# Altium PCB Experiment 8.PcbDoc
Units mm, origin at the board's own origin, x right, y up, seen from the top; angles counter-clockwise.
Board outline 152.4 x 101.6 mm, 2 copper layers (Top Layer, Bottom Layer); 76 components, 93 nets, 240 pads, 20 vias.
Unrouted connection lines stored in the file: 14.
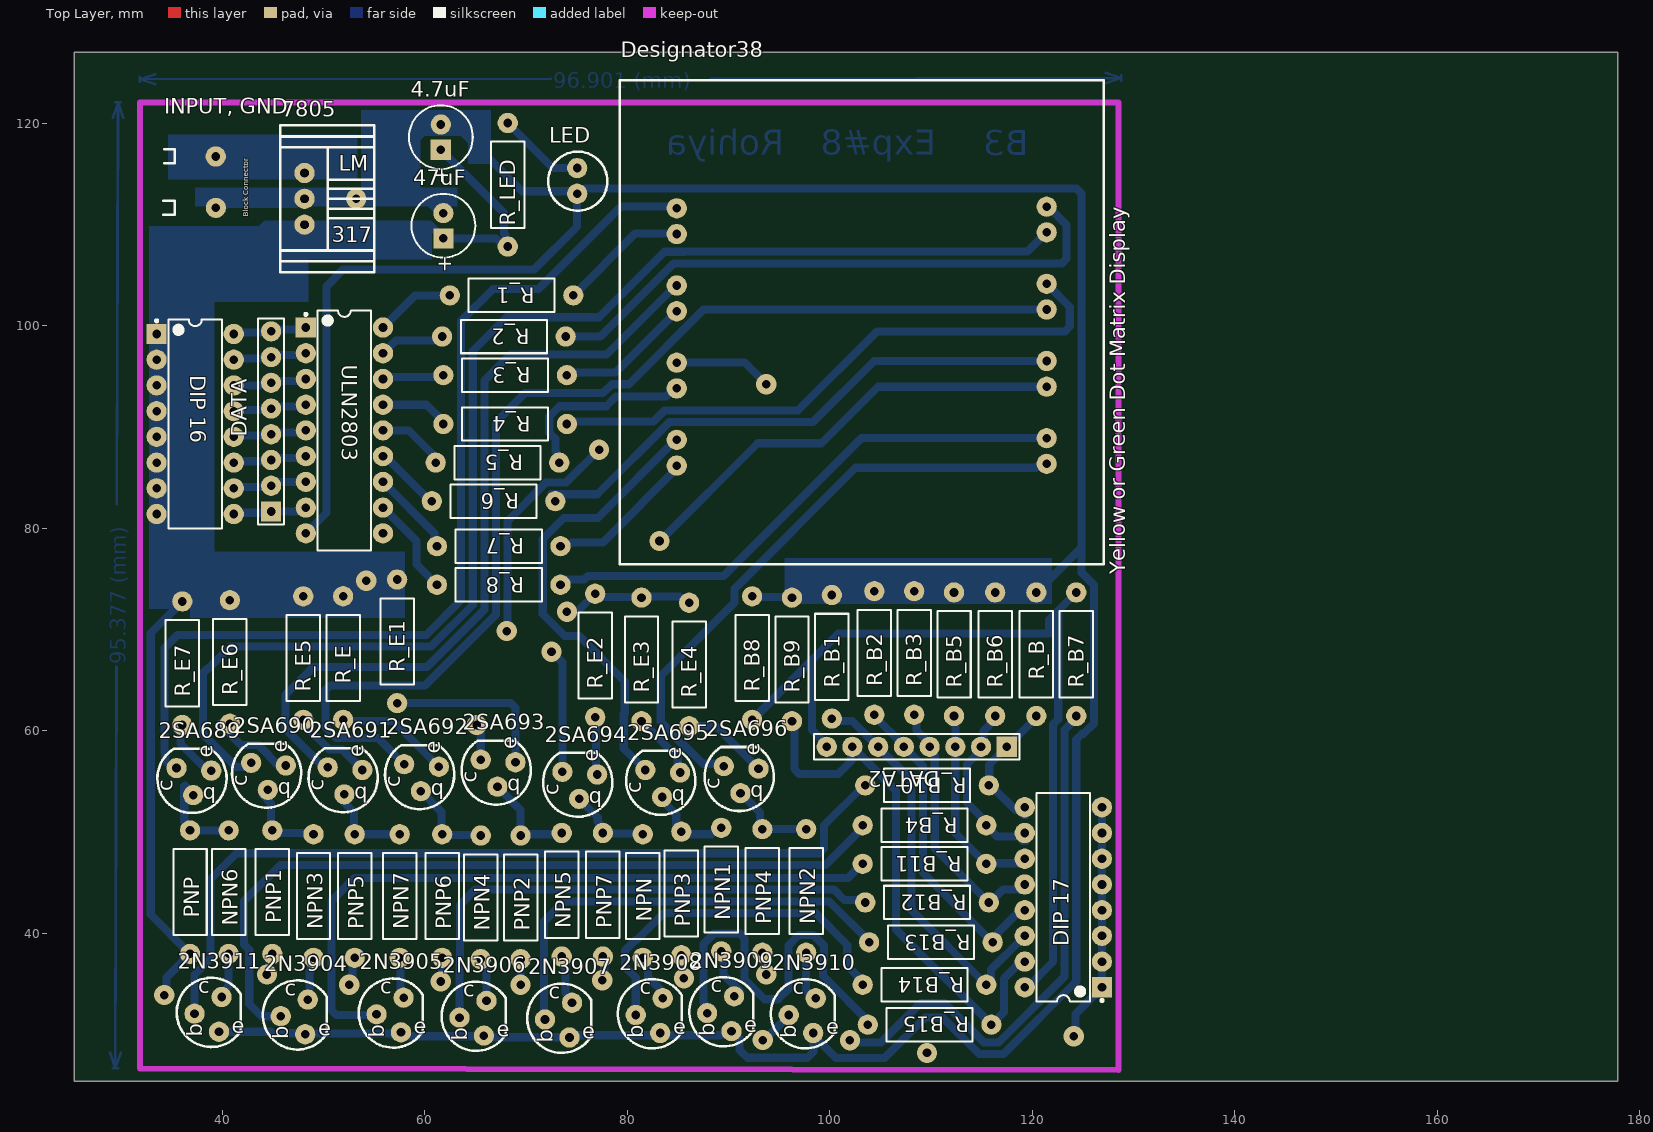
[diagram p0: Top Layer view]
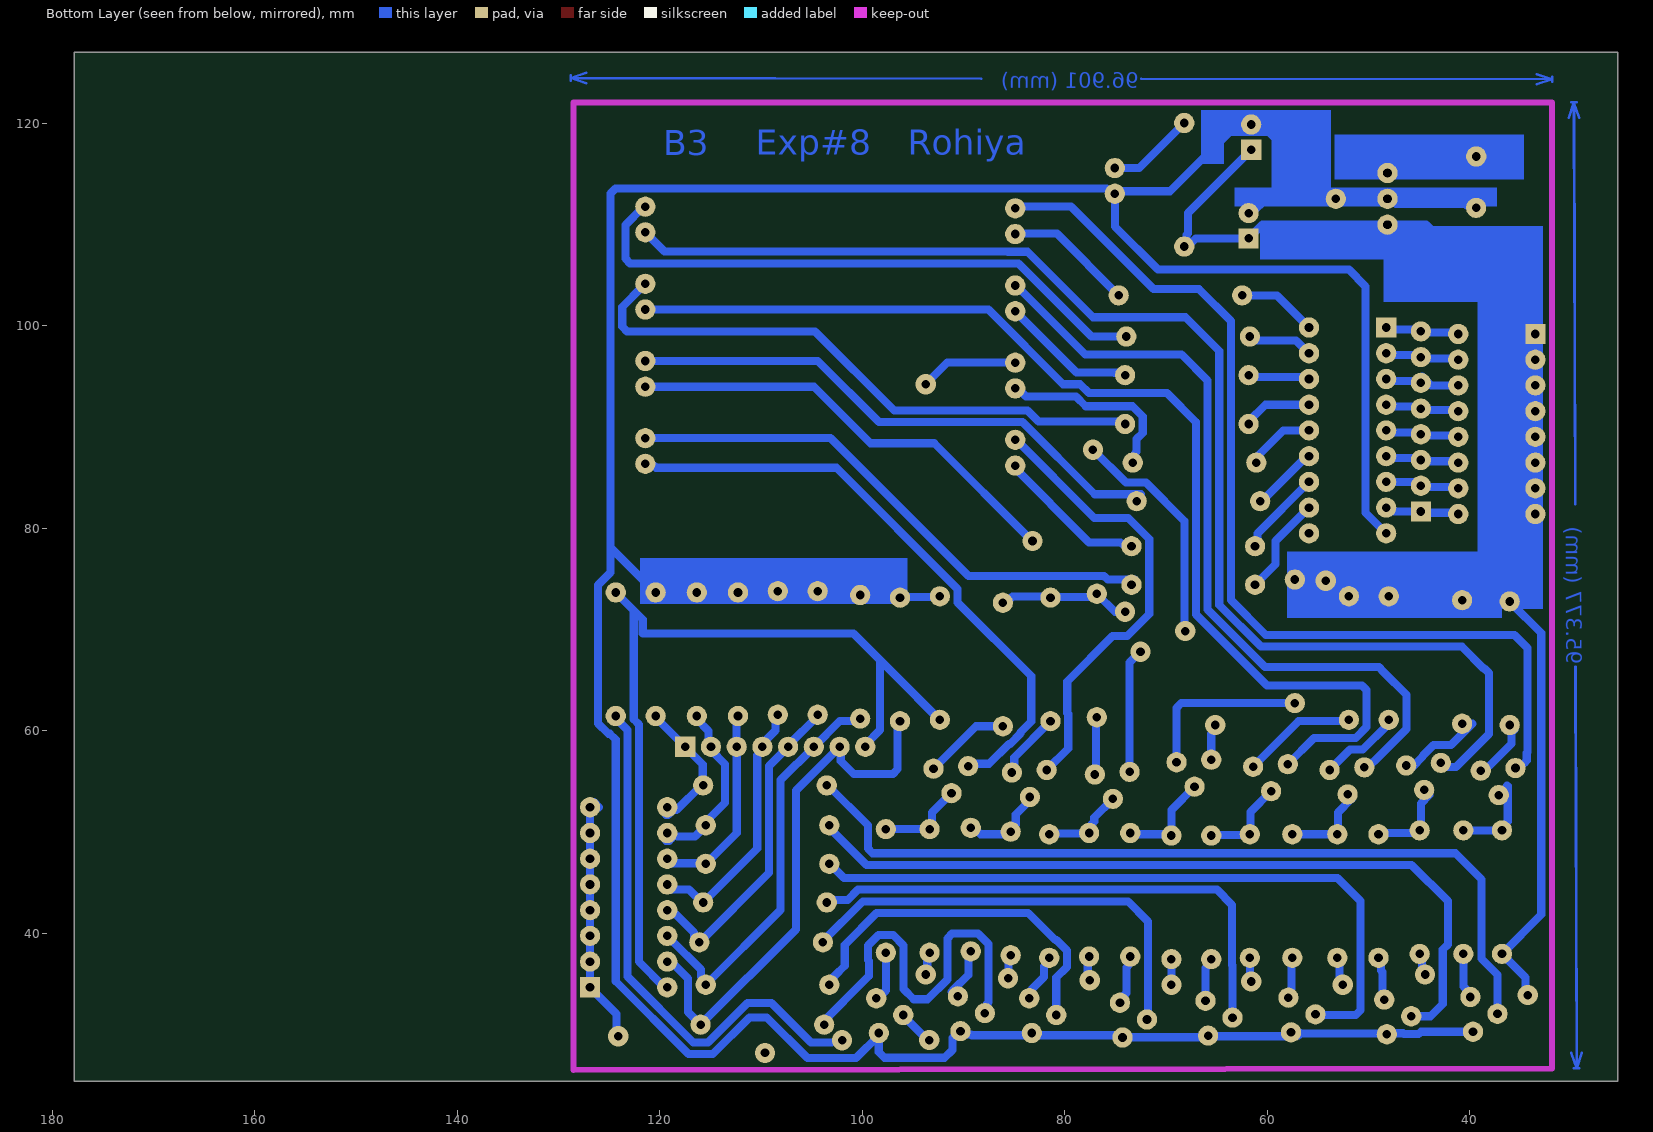
[diagram p1: Bottom Layer view, seen from below]

## Layer stack, top to bottom
Top Solder: solder mask 0.0102, Solder Resist, Dk 3.5
Top Layer: signal copper 0.0356
Dielectric 1: dielectric 0.32, FR-4, Dk 4.8
Bottom Layer: signal copper 0.0356
Bottom Solder: solder mask 0.0102, Solder Resist, Dk 3.5

## Board outline
25.4,25.4 177.8,25.4 177.8,127 25.4,127

## Design rules (kind name [scope] priority, off if disabled: settings)
Clearance [All] p1: gap=0.35 ignorepadtopadclearanceinfootprint=FALSE
PolygonConnect [All] p1: connectstyle=Relief reliefconductorwidth=0.254 reliefentries=4 polygonreliefangle="90 Angle" airgapwidth=0.254
RoutingVias [All] p1: holewidth=0.711 width=1.27 viastyle="Through Hole" minholewidth=0.711 minwidth=1.27 maxholewidth=0.711 maxwidth=1.27
SolderMaskExpansion [All] p1: expansion=0.102 istentingtop=FALSE
Width [All] p1: maxlimit=0.8 minlimit=0.254 preferedwidth=0.8 toplayer_maxwidth=0.254 toplayer_prefwidth=0.254 bottomlayer_minwidth=0.8 minimp=50.000000 maximp=50.000000 favimp=50.000000
30 further rules are at their usual default settings.

## Components (designator, comment, footprint, x,y, rotation, side; value= is the part's Value field where it differs from the comment)
2N3904 "Comment" "TO-92 Packaging" 47.117,31.75 r0 top
2N3905 "Comment" "TO-92 Packaging" 56.578,31.941 r0 top
2N3906 "Comment" "TO-92 Packaging" 64.77,31.623 r0 top
2N3907 "Comment" "TO-92 Packaging" 73.215,31.432 r0 top
2N3908 "Comment" "TO-92 Packaging" 82.169,31.877 r0 top
2N3909 "Comment" "TO-92 Packaging" 89.218,32.067 r0 top
2N3910 "Comment" "TO-92 Packaging" 97.282,31.877 r0 top
2N3911 "Comment" "TO-92 Packaging" 38.608,32.004 r0 top
2SA689 "Comment" "TO-92 Packaging" 37.211,54.991 r90 top
2SA690 "Comment" "TO-92 Packaging" 44.577,55.499 r90 top
2SA691 "Comment" "TO-92 Packaging" 52.133,55.054 r90 top
2SA692 "Comment" "TO-92 Packaging" 59.69,55.372 r90 top
2SA693 "Comment" "TO-92 Packaging" 67.246,55.816 r90 top
2SA694 "Comment" "TO-92 Packaging" 75.311,54.61 r90 top
2SA695 "Comment" "TO-92 Packaging" 83.502,54.8 r90 top
2SA696 "Comment" "TO-92 Packaging" 91.249,55.181 r90 top
4.7uF "Comment" CAPPR2.5-6.3x5 61.595,118.618 r90 top
47uF "Comment" CAPPR2.5-6.3x5 61.849,109.875 r90 top
7805 "Comment" "LM317 with Heat Sink" 48.133,112.532 r270 top
DATA "Comment" HDR1X8 44.831,81.661 r90 top
DATA2 "Comment" HDR1X8 117.475,58.42 r180 top
Designator38 "Comment" "Yellow or Green Dot Matrix DIsplay" 103.15,100.246 r90 top
"DIP 16" "Comment" DIP-16 37.338,90.297 r0 top
"DIP 17" "Comment" DIP-16 123.063,43.561 r180 top
"INPUT, GND" "Comment" "PCB Block Connector" 39.13,114.173 r90 top
LED "Comment" LED 75.057,114.3 r0 top
NPN "Comment" RES12.2-8.5X3.3 81.534,43.688 r90 top
NPN1 "Comment" RES12.2-8.5X3.3 89.281,44.323 r90 top
NPN2 "Comment" RES12.2-8.5X3.3 97.663,44.196 r90 top
NPN3 "Comment" RES12.2-8.5X3.3 49.022,43.688 r90 top
NPN4 "Comment" RES12.2-8.5X3.3 65.532,43.561 r90 top
NPN5 "Comment" RES12.2-8.5X3.3 73.533,43.815 r90 top
NPN6 "Comment" RES12.2-8.5X3.3 40.64,44.069 r90 top
NPN7 "Comment" RES12.2-8.5X3.3 57.531,43.688 r90 top
PNP "Comment" RES12.2-8.5X3.3 36.83,44.069 r90 top
PNP1 "Comment" RES12.2-8.5X3.3 44.958,44.069 r90 top
PNP2 "Comment" RES12.2-8.5X3.3 69.469,43.561 r90 top
PNP3 "Comment" RES12.2-8.5X3.3 85.344,43.942 r90 top
PNP4 "Comment" RES12.2-8.5X3.3 93.345,44.196 r90 top
PNP5 "Comment" RES12.2-8.5X3.3 53.086,43.688 r90 top
PNP6 "Comment" RES12.2-8.5X3.3 61.722,43.688 r90 top
PNP7 "Comment" RES12.2-8.5X3.3 77.597,43.815 r90 top
R_1 "Comment" RES12.2-8.5X3.3 68.58,102.997 r180 top
R_2 "Comment" RES12.2-8.5X3.3 67.818,98.933 r180 top
R_3 "Comment" RES12.2-8.5X3.3 67.945,95.123 r180 top
R_4 "Comment" RES12.2-8.5X3.3 67.945,90.297 r180 top
R_5 "Comment" RES12.2-8.5X3.3 67.183,86.487 r180 top
R_6 "Comment" RES12.2-8.5X3.3 66.802,82.677 r180 top
R_7 "Comment" RES12.2-8.5X3.3 67.31,78.232 r180 top
R_8 "Comment" RES12.2-8.5X3.3 67.31,74.422 r180 top
R_B "Comment" RES12.2-8.5X3.3 120.396,67.564 r90 top
R_B1 "Comment" RES12.2-8.5X3.3 100.203,67.31 r90 top
R_B2 "Comment" RES12.2-8.5X3.3 104.394,67.691 r90 top
R_B3 "Comment" RES12.2-8.5X3.3 108.331,67.691 r90 top
R_B4 "Comment" RES12.2-8.5X3.3 109.347,50.673 r180 top
R_B5 "Comment" RES12.2-8.5X3.3 112.268,67.564 r90 top
R_B6 "Comment" RES12.2-8.5X3.3 116.332,67.564 r90 top
R_B7 "Comment" RES12.2-8.5X3.3 124.333,67.564 r90 top
R_B8 "Comment" RES12.2-8.5X3.3 92.329,67.183 r90 top
R_B9 "Comment" RES12.2-8.5X3.3 96.266,67.052 r90 top
R_B10 "Comment" RES12.2-8.5X3.3 109.601,54.61 r180 top
R_B11 "Comment" RES12.2-8.5X3.3 109.347,46.863 r180 top
R_B12 "Comment" RES12.2-8.5X3.3 109.601,43.053 r180 top
R_B13 "Comment" RES12.2-8.5X3.3 109.982,39.116 r180 top
R_B14 "Comment" RES12.2-8.5X3.3 109.347,34.925 r180 top
R_B15 "Comment" RES12.2-8.5X3.3 109.855,30.988 r180 top
R_E "Comment" RES12.2-8.5X3.3 51.943,67.187 r90 top
R_E1 "Comment" RES12.2-8.5X3.3 57.277,68.838 r90 top
R_E2 "Comment" RES12.2-8.5X3.3 76.835,67.437 r90 top
R_E3 "Comment" RES12.2-8.5X3.3 81.407,67.056 r90 top
R_E4 "Comment" RES12.2-8.5X3.3 86.106,66.548 r90 top
R_E5 "Comment" RES12.2-8.5X3.3 48.006,67.183 r90 top
R_E6 "Comment" RES12.2-8.5X3.3 40.767,66.802 r90 top
R_E7 "Comment" RES12.2-8.5X3.3 36.068,66.675 r90 top
R_LED "Comment" RES12.2-8.5X3.3 68.199,113.919 r90 top
ULN2803 "Comment" DIP-18 52.07,89.662 r0 top

## Footprints (in the part's own frame and the unit in brackets; to place one, negate y for a bottom-side part, rotate by r counter-clockwise, add the part's x,y. Pads: shape width x height; smd on the part's side, far side on the other; paste and mask are expansions set on the pad)
CAPPR2.5-6.3x5 [mm] "Capacitor, Electrolytic, Radial; Body 6.3 x 5 mm (Dia.xH typ); Pin Spacing 2.5 mm (typ)"
  rect 2x2 hole 0.85: 1(-1.25,0)
  round 2 hole 0.85: 2(1.25,0)
  silkscreen extent -3.15,-3.15 3.15,3.15
DIP-16 [mm] "DIP; 16 Leads; Row Spacing 7.62 mm; Pitch 2.54 mm"
  rect 2x2 hole 0.85: 1(-3.81,8.89)
  round 2 hole 0.85: 2(-3.81,6.35) 3(-3.81,3.81) 4(-3.81,1.27) 5(-3.81,-1.27) 6(-3.81,-3.81) 7(-3.81,-6.35) 8(-3.81,-8.89) 9(3.81,-8.89) 10(3.81,-6.35) 11(3.81,-3.81) 12(3.81,-1.27) 13(3.81,1.27) 14(3.81,3.81) 15(3.81,6.35) 16(3.81,8.89)
  silkscreen extent -3.93,-10.3 2.65,10.31, body extent -3.6,-10.28 3.6,10.28, height 5.08
DIP-18 [mm] "DIP; 18 Leads; Row Spacing 7.62 mm; Pitch 2.54 mm"
  rect 2x2 hole 0.85: 1(-3.81,10.16)
  round 2 hole 0.85: 2(-3.81,7.62) 3(-3.81,5.08) 4(-3.81,2.54) 5(-3.81,0) 6(-3.81,-2.54) 7(-3.81,-5.08) 8(-3.81,-7.62) 9(-3.81,-10.16) 10(3.81,-10.16) 11(3.81,-7.62) 12(3.81,-5.08) 13(3.81,-2.54) 14(3.81,0) 15(3.81,2.54) 16(3.81,5.08) 17(3.81,7.62) 18(3.81,10.16)
  silkscreen extent -3.93,-11.85 2.65,11.85, body extent -3.6,-11.8 3.6,11.8, height 5.08
HDR1X8 [mm] "Connector; Header; 8 Position"
  rect 2x2 hole 0.85: 1(0,0)
  round 2 hole 0.85: 2(2.54,0) 3(5.08,0) 4(7.62,0) 5(10.16,0) 6(12.7,0) 7(15.24,0) 8(17.78,0)
  silkscreen extent -1.27,-1.27 19.05,1.27
LED [mm]
  round 2 hole 0.85: 1(0,1.27) 2(0,-1.27)
  silkscreen extent -2.87,-2.95 2.98,2.89
"LM317 with Heat Sink" [mm]
  round 2 hole 0.85 slot 0.8 at 0 deg: adj(-2.55,0) in(2.55,0) out(0,0)
  round 2 hole 0.85: out(0,5.1)
  silkscreen extent -7.25,-2.4 7.25,6.9
"PCB Block Connector" [mm]
  round 2 hole 0.85: 1(-2.54,-0.254) 2(2.54,-0.24)
  silkscreen extent -3.22,3.82 3.25,4.96, body extent -5,-5.45 5.03,4.96, height 5.08
RES12.2-8.5X3.3 [mm] "Resistor, Axial; Body 8.5 x 3.3 mm (LxDia. max), Lead Dia. 0.7 mm (max)"
  round 2 hole 0.85: 1(-6.1,0) 2(6.1,0)
  silkscreen extent -4.25,-1.65 4.25,1.65
"TO-92 Packaging" [mm] "for 2N3904"
  round 2 hole 0.85: T(-1.333,0.064) T(1.079,-1.714) T(1.333,1.714)
  silkscreen extent -3.1,-3.23 3.22,3.61
"Yellow or Green Dot Matrix DIsplay" [mm] "Y or G Dot Matrix"
  round 2 hole 0.85: 3(-13.886,-18.262) 4(-11.346,-18.262) 6(-6.266,-18.262) 7(-3.726,-18.262) 9(1.354,-18.262) 10(3.894,-18.262) 12(8.974,-18.262) 13(11.514,-18.262) 20(11.346,18.262) 21(8.806,18.262) 23(3.726,18.262) 24(1.186,18.262) 26(-3.894,18.262) 27(-6.434,18.262) 29(-11.514,18.262) 30(-14.054,18.262)
  silkscreen extent -23.78,-23.9 23.99,23.89

## Via types
v1: diameter 2, hole 0.85, Top Layer to Bottom Layer, 20 vias

## Nets (pads, with @x,y where several pads share a name; then routed paths per layer and width w, separated by ;. In a path a pad name is that pad's centre, name@x,y a point inside that pad or via, vN(x,y) a via of type N, cw(c..) or ccw(c..) an arc to the next point about the centre after c; other vN are vias at no path point)
2N_b1: 2N3911.T@37.274,32.067 R_B10.2 | length 83.7
  Bottom Layer w0.8: 2N3911.T@37.274,32.067 37.274,35.913 38.862,37.5 38.862,45.339 41.434,47.911 98.972,47.911 99.441,48.38 99.441,50.673 R_B10.2@103.398,54.63
2N_b2: 2N3904.T@45.783,31.813 R_B4.2 | length 78
  Bottom Layer w0.8: 2N3904.T@45.783,31.813 43.878,31.813 42.672,33.02 42.672,38.412 42.164,38.92 42.164,43.18 45.745,46.761 99.593,46.761 103.124,50.292 R_B4.2@103.124,50.419
2N_b3: 2N3905.T@55.245,32.004 R_B11.2 | length 68.4
  Bottom Layer w0.8: 2N3905.T@54.292,31.941 51.269,31.941 50.8,32.409 50.8,43.18 53.086,45.466 101.779,45.466 R_B11.2@103.176,46.863
2N_b4: 2N3906.T@63.436,31.686 R_B12.2 | length 52.3
  Bottom Layer w0.8: 2N3906.T@63.436,31.686 63.436,36.828 63.472,36.863 63.472,42.814 64.974,44.316 100.397,44.316 101.431,43.283 103.271,43.283 R_B12.2
2N_b5: 2N3907.T@71.882,31.496 R_B13.2 | length 44.3
  Bottom Layer w0.8: 2N3907.T@71.882,31.496 71.783,31.595 71.783,41.176 73.773,43.166 99.921,43.166 R_B13.2@103.906,39.181
2N_b6: 2N3908.T@80.835,31.941 R_B14.2 | length 35.9
  Bottom Layer w0.8: 2N3908.T@80.835,32.188 80.835,35.642 79.784,36.693 79.784,38.313 80.809,39.338 80.932,39.338 83.61,42.016 98.573,42.016 101.727,38.862 101.727,36.8 102.669,35.858 102.669,35.828 103.247,35.25 R_B14.2
2N_b7: 2N3909.T@87.884,32.131 R_B15.2 | length 40.3
  Bottom Layer w0.8: 2N3909.T@87.531,31.739 87.654,31.862 87.654,33.076 87.531,33.2 87.531,38.948 88.556,39.973 91.126,39.973 91.595,39.504 91.595,35.451 93.546,33.5 94.906,33.5 95.913,34.507 95.913,38.821 96.938,39.846 98.388,39.846 99.413,38.821 99.413,37.371 99.314,37.272 99.314,35.81 R_B15.2@104.263,30.861
2N_b8: 2N3910.T@95.948,31.941 R_B7.1 | length 55.6
  Bottom Layer w0.8: v1(93.384,29.464) 93.55,29.464 95.631,31.545 2N3910.T@95.631,31.75 ; 103.03,29.238 105.057,29.238 108.952,33.133 111.335,33.133 115.23,29.238 116.68,29.238 123.19,35.748 123.19,60.08 124.438,61.327 R_B7.1@124.438,61.389
  other v1: 101.983,29.445
2N_c1: 2N3911.T@39.941,33.718 NPN6.1 | length 4.9
  Bottom Layer w0.8: 2N3911.T@39.941,33.718 39.941,34.043 40.64,34.742 NPN6.1 NPN6.1@40.41,37.739
2N_c2: 2N3904.T@48.45,33.465 NPN3.1 | length 4.4
  Bottom Layer w0.8: 2N3904.T@48.45,33.465 48.635,33.649 48.635,36.189 48.792,36.346 48.792,37.358 NPN3.1
2N_c3: 2N3905.T@57.912,33.655 NPN7.1 | length 3.1
  Bottom Layer w0.8: 2N3905.T@57.614,34.571 NPN7.1@57.614,37.636
2N_c4: 2N3906.T@66.103,33.337 NPN4.1 | length 4.4
  Bottom Layer w0.8: NPN4.1 65.532,37.136 66.103,36.565 2N3906.T@66.103,33.337
2N_c5: 2N3907.T@74.549,33.147 NPN5.1 | length 4.7
  Bottom Layer w0.8: NPN5.1@73.914,37.449 73.763,37.298 73.763,36.798 73.914,36.646 73.914,34.107 74.549,33.472 2N3907.T@74.549,33.147
2N_c6: 2N3908.T@83.502,33.591 NPN.1 | length 4.7
  Bottom Layer w0.8: NPN.1@82.042,37.453 81.764,37.175 81.764,37.034 82.042,36.755 82.042,35.687 83.273,34.456 83.273,33.821 2N3908.T@83.502,33.591
2N_c7: 2N3909.T@90.551,33.782 NPN1.1 | length 4
  Bottom Layer w0.8: NPN1.1@89.511,37.553 89.511,35.909 91.029,34.391 2N3909.T@91.186,34.234
2N_c8: 2N3910.T@98.615,33.591 NPN2.1 | length 5.2
  Bottom Layer w0.8: NPN2.1 97.663,34.361 98.298,33.726 98.298,33.401 2N3910.T@98.487,33.212
2N_e1: 
2N_e2: 
2N_e3: 
2N_e4: 
2N_e5: 
2N_e6: 
2N_e7: 
2N_e8: 
2S_b1: 2SA689.T@37.148,53.657 NPN6.2 PNP.2 | length 8.5
  Bottom Layer w0.8: 36.322,54.61 36.258,54.546 36.258,54.165 36.258,51.065 36.83,50.494 PNP.2 NPN6.2
2S_b2: 2SA690.T@44.514,54.165 NPN3.2 PNP1.2 | length 8
  Bottom Layer w0.8: 2SA690.T@44.005,53.657 44.831,52.832 44.831,50.603 45.212,50.222 45.212,50.042 45.462,50.042 45.589,49.915 48.895,49.915 NPN3.2
2S_b3: 2SA691.T@52.07,53.721 NPN7.2 PNP5.2 | length 8.5
  Bottom Layer w0.8: 2SA691.T@51.665,53.294 53.016,51.942 53.016,49.858 PNP5.2 NPN7.2
2S_b4: 2SA692.T@59.627,54.038 NPN4.2 PNP6.2 | length 9
  Bottom Layer w0.8: 2SA692.T@59.627,54.038 61.677,51.988 61.677,49.833 PNP6.2 61.785,49.725 65.468,49.725 NPN4.2
2S_b5: 2SA693.T@67.183,54.483 NPN5.2 PNP2.2 | length 10.4
  Bottom Layer w0.8: 2SA693.T@67.501,54.8 67.183,54.483 69.469,52.197 PNP2.2 69.596,49.788 73.406,49.788 NPN5.2
2S_b6: 2SA694.T@75.248,53.276 NPN.2 PNP7.2 | length 8.3
  Bottom Layer w0.8: 2SA694.T@75.248,53.276 77.089,51.435 77.089,51.054 77.367,50.776 77.367,50.145 77.66,49.852 81.471,49.852 NPN.2
2S_b7: 2SA695.T@83.439,53.467 NPN1.2 PNP3.2 | length 8.6
  Bottom Layer w0.8: 2SA695.T@83.439,53.467 83.439,53.15 84.836,51.753 84.836,50.748 85.471,50.113 85.471,49.788 88.321,49.788 88.956,50.423 NPN1.2
2S_b8: 2SA696.T@91.186,53.848 NPN2.2 PNP4.2 | length 8.8
  Bottom Layer w0.8: 2SA696.T@91.186,53.848 93.115,51.919 93.115,50.526 PNP4.2 NPN2.2
2S_c1: 
2S_c2: 
2S_c3: 
2S_c4: 
2S_c5: 
2S_c6: 
2S_c7: 
2S_c8: 
2S_e1: 2SA689.T@38.925,56.07 R_E7.1 | length 4.5
  Bottom Layer w0.8: R_E7.1@35.601,60.108 35.888,59.822 35.888,58.727 38.036,56.578
2S_e2: 2SA690.T@46.291,56.578 R_E6.1 | length 7.8
  Bottom Layer w0.8: 39.751,60.702 41.87,58.583 43.587,58.583 44.613,57.557 44.613,57.495 2SA690.T@45.72,56.388
2S_e3: 2SA691.T@53.848,56.134 R_E5.1 | length 7.6
  Bottom Layer w0.8: R_E5.1@48.133,60.579 50.574,58.138 51.844,58.138 2SA691.T@53.848,56.134
2S_e4: 2SA692.T@61.404,56.451 R_E.1 | length 11.5
  Bottom Layer w0.8: R_E.1@51.816,60.956 56.9,60.956 2SA692.T@61.404,56.451
2S_e5: 2SA693.T@68.961,56.896 R_E1.1 | length 17.3
  Bottom Layer w0.8: R_E1.1 68.492,62.738 68.961,62.269 2SA693.T@68.961,56.896
2S_e6: 2SA694.T@77.025,55.689 R_E2.1 | length 5.7
  Bottom Layer w0.8: R_E2.1 76.93,61.242 76.93,55.785 2SA694.T@77.025,55.689
2S_e7: 2SA695.T@85.217,55.88 R_E3.1 | length 7.8
  Bottom Layer w0.8: R_E3.1@81.015,61.348 R_E3.1@81.541,61.348 ; R_E3.1@81.661,61.468 R_E3.1@81.541,61.348 ; 2SA695.T@85.217,55.88 84.987,56.11 84.987,57.376 R_E3.1 81.407,61.214 R_E3.1@81.541,61.348
2S_e8: 2SA696.T@92.964,56.261 R_E4.1 | length 8.6
  Bottom Layer w0.8: R_E4.1 88.777,60.448 2SA696.T@92.964,56.261
DIP_1: "DIP 17.9" DATA2.1 R_B10.1 R_B.1 | length 13.1
  Bottom Layer w0.8: 118.333,52.166 115.889,54.61 R_B10.1 115.744,54.653 115.744,56.689 DATA2.1 120.396,61.341 R_B.1 ; 118.841,52.039 119.191,51.689 119.38,51.689
DIP_2: "DIP 17.10" DATA2.2 R_B4.1 R_B6.1 | length 16.8
  Bottom Layer w0.8: R_B6.1 116.332,61.139 115.165,59.972 115.165,58.65 DATA2.2 114.935,58.095 113.538,56.698 113.538,52.893 115.447,50.984 115.447,50.627 116.516,49.558 118.265,49.558 ; 118.773,49.431 119.055,49.149 119.38,49.149
DIP_3: "DIP 17.11" DATA2.3 R_B5.1 R_B11.1 | length 19.4
  Bottom Layer w0.8: R_B5.1 112.395,61.337 DATA2.3 112.388,58.413 112.388,49.922 R_B11.1 115.511,46.926 118.808,46.926 118.872,46.99
DIP_4: "DIP 17.12" DATA2.4 R_B3.1 R_B12.1 | length 25.5
  Bottom Layer w0.8: R_B3.1 108.561,61.361 108.561,60.039 109.855,58.745 109.855,58.095 110.363,57.587 110.363,48.391 R_B12.1 ; R_B12.1@115.701,42.926 117.098,44.323 118.999,44.323
DIP_5: "DIP 17.13" DATA2.5 R_B2.1 R_B13.1 | length 31.1
  Bottom Layer w0.8: R_B2.1 104.394,61.466 107.315,58.545 DATA2.5 109.213,56.522 109.213,45.985 R_B13.1 ; R_B13.1@116.082,39.187 116.619,39.723 116.619,40.091 118.453,41.926 118.475,41.926 118.491,41.91
DIP_6: "DIP 17.14" DATA2.6 R_B1.1 R_B14.1 | length 39.5
  Bottom Layer w0.8: R_B1.1@100.433,60.98 102.215,60.98 DATA2.6 108.063,55.132 108.063,42.309 R_B14.1 ; R_B14.1@115.677,34.925 115.677,35.479 115.931,35.733 115.931,36.429 118.872,39.37 118.872,39.751
DIP_7: "DIP 17.15" DATA2.7 R_B9.1 R_B15.1 | length 53.3
  Bottom Layer w0.8: R_B9.1 96.496,60.722 96.496,56.222 96.964,55.753 100.838,55.753 102.114,57.029 102.114,58.299 DATA2.7 106.553,54.102 106.553,40.39 R_B15.1 117.218,32.251 117.218,35.557 118.642,36.981 119.102,36.981 119.126,36.957
DIP_8: "DIP 17.16" DATA2.8 R_B7.2 R_B8.1 | length 89.1
  Bottom Layer w0.8: 94.605,63.294 92.394,61.083 R_B8.1 98.237,66.99 ; DATA2.8 99.695,58.614 98.237,60.073 98.237,66.99 ; 119.253,34.671 119.507,34.671 122.04,37.204 122.04,60.633 122.555,61.148 122.555,71.886 ; R_B7.2 122.555,71.886 ; 98.237,66.99 100.842,69.596 121.666,69.596 121.666,70.997 122.555,71.886
DIP_11: "DIP 16.16" DATA.8 ULN2803.1 | length 7.6
  Bottom Layer w0.8: 41.148,99.187 41.275,99.314 44.577,99.314 DATA.8@44.831,99.568 ; DATA.8 DATA.8@44.831,99.568 ; DATA.8@44.831,99.695 DATA.8@44.831,99.568 ; ULN2803.1 48.069,99.632 44.895,99.632 DATA.8@44.831,99.568
DIP_12: "DIP 16.15" DATA.7 ULN2803.2 | length 7.7
  Bottom Layer w0.8: 41.148,96.647 41.275,96.774 44.704,96.774 DATA.7 45.021,97.091 47.706,97.091 48.006,97.392 48.006,97.536 ULN2803.2
DIP_13: "DIP 16.14" DATA.6 ULN2803.3 | length 8.3
  Bottom Layer w0.8: 41.148,94.107 43.815,94.107 44.704,94.996 44.704,94.488 DATA.6 45.021,94.551 48.197,94.551 48.26,94.615 ULN2803.3
DIP_14: "DIP 16.13" DATA.5 ULN2803.4 | length 8.2
  Bottom Layer w0.8: 41.148,91.567 41.275,91.694 44.704,91.694 DATA.5 45.021,92.011 47.706,92.011 48.006,92.312 48.006,92.71 48.26,92.456 ULN2803.4
DIP_15: "DIP 16.12" DATA.4 ULN2803.5 | length 7.7
  Bottom Layer w0.8: 41.148,89.027 41.275,89.154 44.704,89.154 DATA.4 45.021,89.471 48.069,89.471 ULN2803.5 ULN2803.5@48.514,89.916
DIP_16: "DIP 16.11" DATA.3 ULN2803.6 | length 8.2
  Bottom Layer w0.8: 41.148,86.487 41.275,86.614 44.704,86.614 DATA.3 45.021,86.931 47.706,86.931 48.006,87.232 48.006,87.63 48.26,87.376 ULN2803.6
DIP_17: "DIP 16.10" DATA.2 ULN2803.7 | length 7.6
  Bottom Layer w0.8: 41.148,83.947 41.275,84.074 44.704,84.074 DATA.2 45.212,84.582 48.133,84.582 48.26,84.455 ULN2803.7
DIP_18: "DIP 16.9" DATA.1 ULN2803.8 | length 8.4
  Bottom Layer w0.8: 41.148,81.407 41.275,81.534 44.231,81.534 44.704,82.007 44.704,82.042 44.831,81.915 DATA.1 47.498,81.661 47.649,81.812 47.706,81.812 ULN2803.8@48.26,82.367 ; ULN2803.8 ULN2803.8@48.26,82.367 ; ULN2803.8@48.26,82.423 ULN2803.8@48.26,82.367
GND: 2N3904.T@48.197,30.035 2N3905.T@57.658,30.226 2N3906.T@65.849,29.909 2N3907.T@74.295,29.718 2N3908.T@83.248,30.162 2N3909.T@90.297,30.353 2N3910.T@98.361,30.162 2N3911.T@39.688,30.29 4.7uF.2 47uF.2 7805.out "INPUT, GND.1" LED.2 R_B1.2 R_B2.2 R_B3.2 R_B5.2 R_B6.2 R_B8.2 R_B9.2 R_B.2 ULN2803.9 | length 366.7
  Bottom Layer w0.8: 39.384,111.633 39.614,111.863 40.301,111.863 40.453,112.014 47.29,112.014 47.808,112.532 48.133,112.532 7805.out@53.233,112.532 ; 2N3911.T@39.688,30.29 44.833,30.29 45.059,30.063 46.508,30.063 46.583,30.138 48.094,30.138 48.197,30.035 48.26,30.099 56.642,30.099 56.706,30.162 56.935,29.933 57.686,29.933 57.774,29.845 65.786,29.845 65.849,29.909 66.012,29.746 74.267,29.746 74.295,29.718 74.295,29.845 74.422,29.972 74.454,29.94 83.026,29.94 83.248,30.162 83.475,29.936 89.18,29.936 89.255,30.011 90.766,30.011 91.098,29.679 91.098,28.494 91.878,27.714 97.794,27.714 98.361,28.282 2N3910.T@98.361,30.162 ; ULN2803.9 50.292,81.534 50.292,103.886 51.943,105.537 70.778,105.537 75.057,109.816 LED.2 75.382,113.03 75.89,113.538 124.372,113.538 124.841,113.069 124.841,78.109 ; 47uF.2 61.552,111.125 60.145,112.532 7805.out@53.233,112.532 ; LED.2@74.503,113.26 74.478,113.284 69.596,113.284 63.059,119.821 61.324,119.821 61.276,119.868 60.526,119.118 59.819,119.118 7805.out@53.233,112.532 ; R_B8.2 92.394,73.218 96.2,73.218 R_B9.2 96.395,73.281 100.074,73.281 R_B1.2 100.393,73.601 104.203,73.601 R_B2.2 R_B3.2 ; 2N3910.T@98.361,29.933 100.6,27.695 105.419,27.695 109.423,31.699 111.143,31.699 114.754,28.088 117.156,28.088 124.34,35.272 124.34,59.132 124.922,59.714 125.058,59.714 126.083,60.739 126.083,74.389 124.841,75.631 124.841,78.109 ; R_B3.2@108.136,73.728 112.204,73.728 R_B5.2 R_B6.2 R_B.2 124.841,78.109
INPUT: 7805.adj "INPUT, GND.2" | length 9.5
  Bottom Layer w0.8: 39.37,116.713 39.497,116.84 39.551,116.84 41.309,115.082 7805.adj
LED_R: LED.1 R_LED.2 | length 9.3
  Bottom Layer w0.8: R_LED.2@68.195,120.019 R_LED.2 72.648,115.57 LED.1 75.057,115.189 LED.1@75.184,115.316
PIN_1: Designator38.13 R_2.1 | length 58.7
  Bottom Layer w0.8: R_2.1@73.717,98.933 77.343,98.933 84.563,106.153 122.914,106.153 123.383,106.622 123.383,109.964 Designator38.13@121.644,111.703
PIN_2: 2SA690.T@42.862,56.832 Designator38.12 | length 127.5
  Bottom Layer w0.8: 2SA690.T@42.174,56.434 41.356,56.434 38.097,59.693 38.097,65.698 38.566,66.167 38.634,66.167 40.793,68.326 60.628,68.326 64.745,72.443 64.745,97.511 68.072,100.838 77.216,100.838 83.681,107.303 85.613,107.303 85.625,107.315 119.507,107.315 Designator38.12
PIN_3: Designator38.10 R_4.1 | length 58.6
  Bottom Layer w0.8: R_4.1@74.045,90.551 82.605,90.551 83.687,91.633 96.84,91.633 104.648,99.441 123.222,99.441 123.691,99.91 123.691,101.861 121.741,103.811 Designator38.10@121.741,104.18
PIN_4: 2SA692.T@57.975,56.706 Designator38.9 | length 110.9
  Bottom Layer w0.8: 2SA692.T@57.975,56.706 55.393,59.288 51.267,59.288 50.193,60.362 50.193,64.019 50.662,64.488 60.043,64.488 67.045,71.49 67.045,90.475 69.915,93.345 77.597,93.345 78.479,94.227 80.157,94.227 87.53,101.6 Designator38.9
PIN_5: Designator38.7 R_6.1 | length 54.8
  Bottom Layer w0.8: R_6.1@72.648,83.058 72.648,83.181 72.467,83.362 72.902,83.362 77.042,83.362 84.163,90.483 98.357,90.483 104.394,96.52 Designator38.7
PIN_6: 2SA694.T@73.596,55.944 Designator38.6 | length 56.9
  Bottom Layer w0.8: v1(72.517,67.818) 73.596,66.739 2SA694.T@73.596,55.944 ; v1(83.185,78.74) 83.238,78.74 92.89,88.392 99.187,88.392 104.775,93.98 Designator38.6
PIN_7: Designator38.4 R_8.1 | length 54.1
  Bottom Layer w0.8: R_8.1@73.083,74.93 75.753,74.93 76.11,75.287 89.511,75.287 103.124,88.9 Designator38.4
PIN_8: 2SA696.T@89.535,56.515 Designator38.3 | length 60.2
  Bottom Layer w0.8: 2SA696.T@89.535,56.515 89.305,56.745 87.47,56.745 85.517,58.698 85.381,58.698 84.356,59.723 84.356,59.859 83.312,60.903 83.312,65.405 90.579,72.672 90.579,74.008 102.55,85.979 120.343,85.979 120.495,86.13 121.182,86.13 Designator38.3
PIN_9: Designator38.30 R_7.1 | length 14.8
  Bottom Layer w0.8: R_7.1@73.66,78.613 73.811,78.462 74.327,78.462 74.479,78.613 77.597,78.613 Designator38.30@85.217,86.233
PIN_10: 2SA695.T@81.788,56.134 Designator38.29 | length 45.4
  Bottom Layer w0.8: 2SA695.T@81.788,56.134 79.657,58.265 79.657,61.681 79.756,61.78 79.756,64.888 75.274,69.37 73.824,69.37 71.66,71.534 71.66,78.957 73.729,81.026 77.089,81.026 Designator38.29@84.963,88.9
PIN_11: Designator38.27 R_5.1 | length 18.7
  Bottom Layer w0.8: R_5.1 73.053,86.717 73.053,87.4 72.898,87.556 72.898,88.808 72.295,89.411 72.295,91.022 73.32,92.047 77.925,92.047 78.892,93.014 83.819,93.014 84.618,93.813 Designator38.27
PIN_12: 2SA693.T@65.532,57.15 Designator38.26 | length 36
  Bottom Layer w0.8: v1@65.024,60.198 65.532,59.69 2SA693.T@65.532,57.15 ; v1(68.1,69.85) 68.195,69.945 68.195,80.716 71.991,84.512 73.971,84.512 v1(77.216,87.757) ; Designator38.26@84.709,96.266 84.796,96.353 Designator38.26 91.607,96.353 v1(93.726,94.234)
  other v1: 65.151,60.579
PIN_13: Designator38.24 R_3.1 | length 13.5
  Bottom Layer w0.8: R_3.1 74.275,95.353 75.089,95.353 75.114,95.377 78.832,95.377 Designator38.24@84.928,101.473
PIN_14: 2SA691.T@50.419,56.388 Designator38.23 | length 77.9
  Bottom Layer w0.8: 2SA691.T@50.419,56.388 50.094,56.388 49.529,56.953 49.473,56.953 46.256,60.17 46.256,63.567 48.514,65.825 48.983,66.294 60.223,66.294 65.895,71.966 65.895,94.597 68.453,97.155 77.978,97.155 Designator38.23@84.963,104.14
PIN_15: Designator38.21 R_1.1 | length 13.1
  Bottom Layer w0.8: R_1.1 80.776,109.093 Designator38.21@85.217,109.093
PIN_16: 2SA689.T@35.496,56.325 Designator38.20 | length 96.1
  Bottom Layer w0.8: 34.608,56.832 34.378,57.062 34.378,57.813 34.29,57.901 34.29,68.179 35.587,69.476 60.152,69.476 63.595,72.919 63.595,100.464 66.763,103.632 71.247,103.632 79.375,111.76 Designator38.20@84.709,111.76
R_1: R_1.2 ULN2803.18 | length 7.9
  Bottom Layer w0.8: ULN2803.18 59.055,102.997 R_1.2
R_2: R_2.2 ULN2803.17 | length 6.5
  Bottom Layer w0.8: ULN2803.17 57.15,98.552 61.012,98.552 61.393,98.933 R_2.2
R_3: R_3.2 ULN2803.16 | length 6.7
  Bottom Layer w0.8: ULN2803.16@55.626,95.25 ULN2803.16@55.88,94.996 ; ULN2803.16 ULN2803.16@55.88,94.996 ; R_3.2 61.654,94.932 55.944,94.932 ULN2803.16@55.88,94.996
R_4: R_4.2 ULN2803.15 | length 7.2
  Bottom Layer w0.8: ULN2803.15@55.753,92.583 ULN2803.15@55.88,92.456 ; ULN2803.15 ULN2803.15@55.88,92.456 ; R_4.2@61.845,90.551 60.194,92.202 56.134,92.202 ULN2803.15@55.88,92.456
R_5: R_5.2 ULN2803.14 | length 5.9
  Bottom Layer w0.8: ULN2803.14 58.42,89.662 R_5.2@60.791,87.291
R_6: R_6.2 ULN2803.13 | length 6.7
  Bottom Layer w0.8: ULN2803.13 56.068,87.122 60.513,82.677 R_6.2
R_7: R_7.2 ULN2803.12 | length 10.6
  Bottom Layer w0.8: ULN2803.12 55.88,84.963 56.007,85.09 56.007,84.455 60.98,79.482 R_7.2@60.98,78.462 ; R_7.2 61.087,78.109 61.087,77.724 61.468,78.105 R_7.2@61.722,78.105
R_8: R_8.2 ULN2803.11 | length 9.8
  Bottom Layer w0.8: ULN2803.11 59.182,78.74 59.182,76.45 R_8.2
VCC: 4.7uF.1 47uF.1 7805.in "DIP 16.1" "DIP 16.2" "DIP 16.3" "DIP 16.4" "DIP 16.5" "DIP 16.6" "DIP 16.7" "DIP 16.8" "DIP 17.1" "DIP 17.2" "DIP 17.3" "DIP 17.4" "DIP 17.5" "DIP 17.6" "DIP 17.7" "DIP 17.8" PNP1.1 PNP2.1 PNP3.1 PNP4.1 PNP5.1 PNP6.1 PNP7.1 PNP.1 R_E1.2 R_E2.2 R_E3.2 R_E4.2 R_E5.2 R_E6.2 R_E7.2 R_E.2 R_LED.1 | length 205.6
  Bottom Layer w0.8: 33.528,81.28 33.528,75.315 R_E7.2 36.131,72.839 40.703,72.839 R_E6.2 ; 33.528,81.661 33.528,83.693 ; 33.528,83.947 33.528,85.933 33.228,86.233 33.02,86.233 33.274,86.487 33.528,86.487 33.528,89.027 33.528,91.059 33.401,91.186 33.528,91.313 33.528,91.567 33.528,94.107 33.528,96.647 33.528,99.187 33.528,99.314 33.655,99.441 33.782,99.441 44.323,109.982 7805.in ; v1(34.29,33.909) 34.52,34.139 34.52,35.659 PNP.1 32.953,41.846 32.953,69.66 35.982,72.689 R_E7.2@35.982,72.73 ; R_E6.2@40.894,73.033 40.96,73.099 45.147,73.099 45.212,73.164 ; v1(44.422,35.941) 44.422,36.266 44.728,36.572 44.728,37.739 PNP1.1 ; 45.525,73.478 R_E.2@51.371,73.478 ; R_E5.2@48.387,73.478 R_E.2@51.371,73.478 ; 7805.in@48.641,109.982 60.492,109.982 47uF.1 67.068,108.625 67.874,107.819 R_LED.1 67.969,108.049 67.969,108.942 67.818,109.093 67.818,111.145 4.7uF.1 ; R_E.2@51.562,73.668 R_E.2@51.371,73.478 ; R_E.2 55.622,73.287 57.404,75.069 v1@54.348,75.069 ; v1(52.55,34.925) 52.55,35.25 52.856,35.556 52.856,37.358 PNP5.1 ; v1(61.595,35.25) 61.722,35.377 PNP6.1 ; v1(69.469,34.925) PNP2.1 PNP2.1@69.469,37.786 ; v1(74.041,71.755) 75.053,71.755 R_E2.2 ; R_E2.2@76.835,73.22 81.343,73.22 R_E3.2 ; v1(77.534,35.369) 77.724,35.56 PNP7.1@77.724,37.76 ; PNP7.1 77.679,37.715 PNP7.1@77.724,37.76 ; PNP7.1@77.827,37.862 PNP7.1@77.724,37.76 ; R_E3.2@81.206,73.267 85.162,73.267 85.781,72.648 R_E4.2 ; PNP3.1@85.344,37.592 85.562,37.374 85.562,35.596 v1(85.598,35.56) ; PNP4.1 93.575,37.866 93.575,36.092 v1(93.726,35.941) ; v1(124.079,29.845) 124.247,30.013 124.247,32.045 126.873,34.671 126.873,37.211 126.873,39.751 126.873,42.291 126.873,44.831 126.873,47.371 126.873,49.911 126.873,52.451 ; 126.492,52.451 125.984,52.451 126.492,52.959
  other v1: 109.601,28.194 54.229,74.807
"": 
pads on no net: ULN2803.10
copper on no net: | length 175.3
  Bottom Layer w0.254: 28.96,28.195 29.464,26.67 ; 29.206,120.524 29.718,122.047 ; 29.21,26.671 29.718,26.669 ; 29.464,122.048 29.972,122.046 ; 29.57,66.335 29.464,26.67 ; 29.612,82.382 29.718,122.047 ; 29.976,28.193 29.464,26.67 ; 30.222,120.522 29.718,122.047 ; 31.877,124.589 31.878,124.081 ; 33.401,124.845 31.878,124.335 ; 33.402,123.829 31.878,124.335 ; 72.431,124.388 31.878,124.335 ; 88.225,124.409 128.779,124.462 ; 127.254,124.968 128.779,124.462 ; 127.255,123.952 128.779,124.462 ; 128.778,124.716 128.779,124.208

## Keep-outs
Keep-Out Layer:
  lines w0.6: 31.877,26.645 31.877,122.047 128.524,122.047 128.524,26.518 31.877,26.645

## Other copper
Bottom Layer:
  region net GND: 66.548,115.951 66.548,121.285 64.262,121.285 64.262,115.951
  rectangle net GND: 53.721,118.745 65.024,121.285
  rectangle net GND: 53.721,111.76 59.563,121.031
  rectangle net GND: 95.504,72.517 121.92,77.089
  rectangle net VCC: 36.83,71.12 58.039,77.724
  rectangle net VCC: 32.766,72.009 39.243,102.743
  rectangle net VCC: 32.766,102.362 48.514,106.934
  rectangle net VCC: 32.766,106.553 60.706,109.855
  rectangle net INPUT: 34.671,114.427 53.34,118.872
  rectangle net GND: 37.338,111.76 63.246,113.665
  text "96.901 (mm)" at 72.686,123.474 h1.52 r0.08
  text "Rohiya" at 95.512,116.903 h2.5
  text "Exp#8" at 110.498,116.903 h2.5
  text "B3" at 119.642,116.832 h2.5
  text "95.377 (mm)" at 30.484,66.586 h1.52 r89.85

## Text inside footprints (layer, text, board x,y; h text height)
2N3904: Top Overlay "b" at 46.545,29.527 h1.52 r90; Top Overlay "e" at 49.466,29.909 h1.5; Top Overlay "c" at 46.164,33.846 h1.5
2N3905: Top Overlay "b" at 56.007,29.718 h1.52 r90; Top Overlay "e" at 58.928,30.099 h1.5; Top Overlay "c" at 55.626,34.036 h1.5
2N3906: Top Overlay "b" at 64.198,29.4 h1.52 r90; Top Overlay "e" at 67.12,29.781 h1.5; Top Overlay "c" at 63.817,33.718 h1.5
2N3907: Top Overlay "b" at 72.644,29.21 h1.52 r90; Top Overlay "e" at 75.565,29.591 h1.5; Top Overlay "c" at 72.263,33.528 h1.5
2N3908: Top Overlay "b" at 81.597,29.654 h1.52 r90; Top Overlay "e" at 84.519,30.035 h1.5; Top Overlay "c" at 81.216,33.972 h1.5
2N3909: Top Overlay "b" at 88.646,29.845 h1.52 r90; Top Overlay "e" at 91.567,30.226 h1.5; Top Overlay "c" at 88.265,34.163 h1.5
2N3910: Top Overlay "b" at 96.71,29.654 h1.52 r90; Top Overlay "e" at 99.632,30.035 h1.5; Top Overlay "c" at 96.329,33.972 h1.5
2N3911: Top Overlay "c" at 37.655,34.099 h1.5; Top Overlay "e" at 40.957,30.162 h1.5; Top Overlay "b" at 38.036,29.781 h1.52 r90
2SA689: Top Overlay "c" at 35.115,54.038 h1.5 r90; Top Overlay "e" at 39.052,57.34 h1.5 r90; Top Overlay "b" at 39.433,54.419 h1.52 r180
2SA690: Top Overlay "b" at 46.799,54.927 h1.52 r180; Top Overlay "e" at 46.419,57.848 h1.5 r90; Top Overlay "c" at 42.481,54.546 h1.5 r90
2SA691: Top Overlay "b" at 54.356,54.483 h1.52 r180; Top Overlay "e" at 53.975,57.404 h1.5 r90; Top Overlay "c" at 50.038,54.102 h1.5 r90
2SA692: Top Overlay "b" at 61.912,54.8 h1.52 r180; Top Overlay "e" at 61.531,57.721 h1.5 r90; Top Overlay "c" at 57.594,54.419 h1.5 r90
2SA693: Top Overlay "b" at 69.469,55.245 h1.52 r180; Top Overlay "e" at 69.088,58.166 h1.5 r90; Top Overlay "c" at 65.151,54.864 h1.5 r90
2SA694: Top Overlay "b" at 77.534,54.038 h1.52 r180; Top Overlay "e" at 77.153,56.959 h1.5 r90; Top Overlay "c" at 73.215,53.657 h1.5 r90
2SA695: Top Overlay "b" at 85.725,54.229 h1.52 r180; Top Overlay "e" at 85.344,57.15 h1.5 r90; Top Overlay "c" at 81.407,53.848 h1.5 r90
2SA696: Top Overlay "b" at 93.472,54.61 h1.52 r180; Top Overlay "e" at 93.091,57.531 h1.5 r90; Top Overlay "c" at 89.154,54.229 h1.5 r90
4.7uF: Top Overlay "+" at 62.345,113.993 h1.5 r90
47uF: Top Overlay "+" at 62.599,105.25 h1.5 r90
7805: Top Overlay "LM" at 51.533,115.282 h1.52; Top Overlay "317" at 50.833,108.232 h1.52
Designator38: Top Overlay "Yellow or Green Dot Matrix Display" at 129.185,75.481 h1.52 r90
"INPUT, GND": Top Overlay "Block Connector" at 42.559,110.744 h0.51 r90